# Altium PCB 采集卡.PcbDoc (part 2 of 2)
Units mil, origin at the board's own origin, x right, y up, seen from the top; angles counter-clockwise.
Board outline 5354.33 x 3248.82 mil, 2 copper layers (Top Layer, Bottom Layer); 90 components, 107 nets, 465 pads, 100 vias.
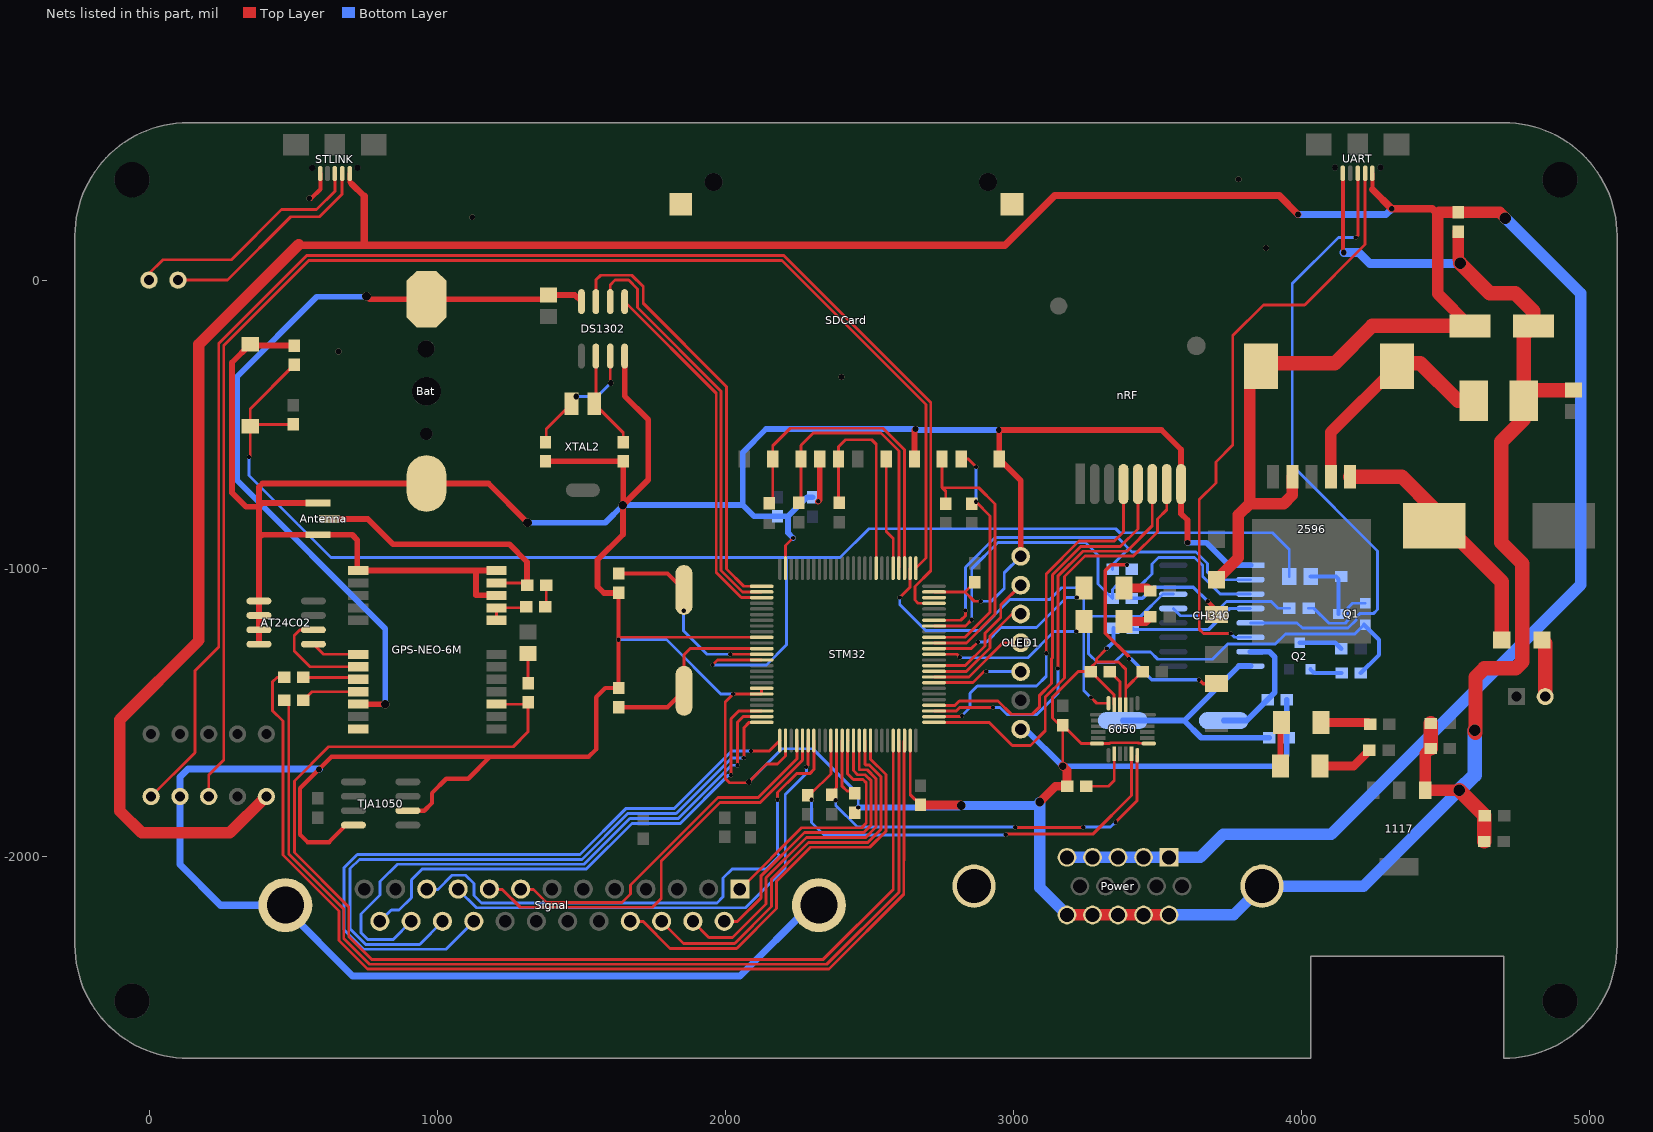
[diagram p2: the nets of this part, all layers, seen from the top]

## Via types
v1: diameter 15, hole 15, Top Layer to Bottom Layer, 60 vias
v2: diameter 20, hole 20, Top Layer to Bottom Layer, 20 vias
v3: diameter 30, hole 30, Top Layer to Bottom Layer, 9 vias
v4: diameter 40, hole 40, Top Layer to Bottom Layer, 8 vias
v5: diameter 25, hole 25, Top Layer to Bottom Layer, 2 vias
v6: diameter 35, hole 35, Top Layer to Bottom Layer, 1 vias

## Nets (pads, with @x,y where several pads share a name; then routed paths per layer and width w, separated by ;. In a path a pad name is that pad's centre, name@x,y a point inside that pad or via, vN(x,y) a via of type N, cw(c..) or ccw(c..) an arc to the next point about the centre after c; other vN are vias at no path point) (continued)
GND: 0hm.2 3V.2 5V.2 1117.1 6050.1 6050.9 6050.11 6050.18 Antenna.2 Antenna.3 AT24C02.1 AT24C02.2 AT24C02.3 AT24C02.4 Bat.2 C2.2 C3.2 C4.2 C5.1 C6.1 C7.1 C8.2 C9.1 C10.2 C11.2 C12.1 C13.2 C14.2 C15.2 C16.2 C17.1 C18.1 C19.1 C20.1 C21.2 C22.1 CH340.1 D2.1 DS1302.4 GPS-NEO-6M.10 GPS-NEO-6M.12 GPS-NEO-6M.13 GPS-NEO-6M.24 nRF.8 OLED1.1 OLED1.7 pad.4 Power.11 Power.12 Power.13 Power.14 Power.15 Power.16 Power.17 R10.1 R18.1 RST.1 SDCard.6 SDCard.10 SDCard.11 SDCard.12 SDCard.13 Signal.26 Signal.27 STLINK.5 STM32.10 STM32.19 STM32.20 STM32.27 STM32.49 STM32.74 STM32.99 TJA1050.2 TJA1050.8 UART.5 | length 27662.9
  Top Layer w10: 1630,-1239.94 STM32.10@2126.79,-1239.94 ; STM32.19@2126.79,-1417.11 STM32.20@2126.79,-1436.8 v1(2028.2,-1436.8) 2000.5,-1464.5 2000.5,-1730.5 2015,-1745 2079,-1745 v2(2082,-1742) 2144,-1680 2182,-1680 2209.46,-1652.54 STM32.27@2209.46,-1598.21 ; STM32.99@2209.46,-999.79 2209.46,-921.54 v1(2236,-895) ; STM32.49@2642.54,-1598.21 2642.54,-1786.54 C17.1@2678,-1822 ; STM32.74@2725.21,-1082.46 2832.54,-1082.46 ; C18.1@2866,-1049 2832.54,-1082.46 ; v1(2887,-1115) 2865.07,-1115 2832.54,-1082.46 ; v5@3172,-1686 C14.2@3172,-1544.93 ; v1(3325,-1279) 3289,-1315 3289,-1326 ; 6050.11@3351,-1474 3349.69,-1472.69 3349.69,-1439.62 C15.2@3269.07,-1359 ; 6050.9@3391,-1474 3391,-1417.07 ; C11.2@3449.07,-1359 3391,-1417.07 ; 6050.1@3471,-1609 3469.69,-1607.69 3436.03,-1607.69 3434.34,-1606 3338,-1606 3335,-1609 6050.18@3291,-1609 3236.07,-1609 C14.2@3172,-1544.93 ; C14.2@3172,-1544.93 3161.93,-1544.93 3137.02,-1520.02 3137.02,-1447.98 3226,-1359 C15.2@3269.07,-1359 ; C15.2@3269.07,-1359 3269.07,-1345.93 3289,-1326 ; 3289,-1326 3366,-1326 3391,-1351 3391,-1417.07
  Top Layer w15: AT24C02.3@376.51,-1209 AT24C02.3@381.51,-1214 ; v2(556,284) 561,284 562,283 594.82,315.82 STLINK.5@594.82,371 ; TJA1050.8@709.51,-1892 684,-1892 625,-1951 550,-1951 524,-1925 524,-1764 633,-1655 1184,-1655 ; TJA1050.2@898.49,-1842 955,-1842 982,-1815 982,-1781 1032,-1731 1108,-1731 1184,-1655 ; C12.1@1631,-1085.38 1630,-1086.38 C9.1@1630,-1416 1584,-1416 1552,-1448 1552,-1629 1526,-1655 1184,-1655 ; v2@4144.82,96 UART.5@4144.82,371
  Top Layer w20: RST.1@351,-222.5 288,-285.5 288,-738 336.49,-786.49 381.51,-786.49 ; RST.1@355.57,-227.07 C21.2@504,-227.07 ; AT24C02.4@381.51,-1264 AT24C02.3@381.51,-1214 AT24C02.2@381.51,-1164 AT24C02.1@381.51,-1114 381.51,-895.49 ; Antenna.2@586,-774 394,-774 381.51,-786.49 ; GPS-NEO-6M.10@1206,-1094.28 1135.28,-1094.28 1135,-1094 1135,-1007.66 ; GPS-NEO-6M.12@1206,-1007.66 1135,-1007.66 ; v3(1314,-842) 1178,-706 Bat.2@963,-706 394,-706 381.51,-718.49 381.51,-786.49 ; C22.1@1376,-629 C20.1@1646,-629 v3@1646,-780 ; C12.1@1630,-1086.38 1579.38,-1086.38 1557,-1064 1557,-971 1645,-883 v3(1645,-781) v3@1646,-780 ; DS1302.4@1651,-263.49 1651,-402 1733,-484 1733,-693 v3@1646,-780 ; v1@2322,-769 v1(2323,-768) 2328.52,-762.48 SDCard.10@2328.52,-621 ; SDCard.6@2657.65,-621 2657.65,-520.35 v2(2661,-517) ; OLED1.7@3026,-959 3026,-695.25 SDCard.11@2951.75,-621 2951.75,-521.75 v2(2950,-520) 3515,-520 3583,-588 3583,-811 3605,-833 v2(3605,-912) ; 5V.2@3928.2,-1687 3928.2,-1539 3V.2@3931.2,-1536 ; 381.51,-895.49 393,-884 Antenna.3@586,-884 705,-884 723,-902 723,-1004.66 GPS-NEO-6M.13@726,-1007.66 1135,-1007.66 ; 381.51,-895.49 381.51,-786.49
  Top Layer w30: C17.1@2678,-1822 2818,-1822 v3(2820,-1824) ; v3(3092,-1812) 3147,-1757 C4.2@3187.07,-1757 3187.07,-1701.07 v5@3172,-1686
  Top Layer w40: Power.15@3187.84,-2204 Power.11@3542.16,-2204 ; C7.1@4449.07,-1625.93 C7.1@4449,-1626 4430.55,-1644.45 1117.1@4430.55,-1771.13 v4(4549.13,-1771.13) ; v4@4545,73.14 C3.2@4545,168.07
  Top Layer w50: C7.1@4449.07,-1625.93 C8.2@4449.07,-1539 ; v4(4549.13,-1771.13) 4636,-1858 C6.1@4636,-1949 ; v4(4552,58) 4655,-45 4743,-45 4806,-108 C2.2@4806,-159 4772.61,-192.39 D2.1@4772.61,-419 ; v4(4602,-1563) 4602,-1568 4605,-1571 4605,-1379 4636,-1348 4745,-1348 4768,-1325 4768,-985 4694,-911 4694,-561 4772.61,-482.39 D2.1@4772.61,-419 ; 0hm.2@4946,-381.6 4810.02,-381.6 D2.1@4772.61,-419
  Bottom Layer w10: v1(1630,-1248) 1796,-1248 1984.8,-1436.8 v1(2028.2,-1436.8) ; v2(2082,-1742) 2197,-1627 2304,-1627 2462,-1785 v1(2462,-1831) ; v1(2887,-1115) 2924,-1115 2969,-1070 2969,-1016 OLED1.7@3026,-959
  Bottom Layer w15: v1(3325,-1279) 3348.07,-1255.93 C10.2@3348.07,-1208
  Bottom Layer w20: v3(1314,-842) 1584,-842 v3(1645,-781) 2061,-781 ; v1(2236,-895) 2218,-877 2218,-820 ; R18.1@2303,-754 2284,-754 2218,-820 ; v1(2462,-1831) 2813,-1831 v3(2820,-1824) ; v2(2950,-520) 2664,-520 v2(2661,-517) 2142,-517 2061,-598 2061,-781 ; OLED1.1@3026,-1559 3043,-1559 v5(3172,-1688) 3911.93,-1688 3949.93,-1650 C13.2@3949.93,-1457 ; v2(3605,-912) 3671,-912 3749,-990 CH340.1@3823.72,-990 ; 2061,-781 2100,-820 C19.1@2182,-820 2218,-820
  Bottom Layer w25: v2@591,-1697 135,-1697 107,-1725 pad.4@107,-1792.54 107,-2029 247.98,-2169.98 Signal.27@472.78,-2169.98 472.78,-2181.68 706.6,-2415.5 2051.5,-2415.5 2297.02,-2169.98 Signal.26@2325.22,-2169.98
  Bottom Layer w30: v3(2820,-1824) 3080,-1824 v3(3092,-1812) ; v2(4148,96) 4200,96 4238,58 v4(4552,58)
  Bottom Layer w40: v3@3093,-1814 3093,-2109.16 Power.15@3187.84,-2204 ; Power.11@3542.16,-2204 3765,-2204 3865,-2104 4216.25,-2104 v4(4549.13,-1771.13)
  Bottom Layer w50: v4(4549.13,-1771.13) 4602,-1718.25 v4(4602,-1563)
  other v2: 590,-1699 2404,-336 658,-248 3878,112 1122,218 3782,350
GPS_SCL: AT24C02.6 GPS-NEO-6M.19 | length 373.3
  Top Layer w10: AT24C02.6@570.49,-1214 524,-1214 504,-1234 504,-1288 558.31,-1342.31 GPS-NEO-6M.19@726,-1342.31
GPS_SDA: AT24C02.5 GPS-NEO-6M.18 | length 170
  Top Layer w10: AT24C02.5@570.49,-1264 605.49,-1299 GPS-NEO-6M.18@726,-1299
INT: 6050.12 STM32.77 | length 1332.6
  Top Layer w10: v1(2606,-1102) 2642,-1066 2642,-1000.32 STM32.77@2642.54,-999.79 ; v1(3270,-1449) 3290,-1469 6050.12@3331,-1469
  Bottom Layer w10: v1(2606,-1102) 2606,-1126 2697,-1217 2881,-1217 2989,-1109 3127,-1109 3168,-1068 3230,-1068 3245,-1083 3245,-1425 v1@3270,-1450
IO0: Signal.17 STM32.42 | length 1486.9
  Top Layer w10: Signal.17@1670.75,-2226.89 1715.43,-2226.89 1808.54,-2320 2040.04,-2320 2178.04,-2182 2178.04,-2087.08 2296.12,-1969 2502.17,-1969 2558,-1913.17 2558,-1716.83 2504.74,-1663.57 STM32.42@2504.74,-1598.21
IO1: Signal.16 STM32.41 | length 1351.8
  Top Layer w10: Signal.16@1779.45,-2226.89 1855.56,-2303 2033,-2303 2161.04,-2174.96 2161.04,-2080.04 2289.08,-1952 2495.12,-1952 2541,-1906.12 2541,-1723.88 2500.12,-1683 2487,-1683 2485.06,-1681.06 STM32.41@2485.06,-1598.21
IO2: Signal.15 STM32.40 | length 1211
  Top Layer w10: Signal.15@1888.15,-2226.89 1943.26,-2282 2026,-2282 2142,-2166 2142,-2075.04 2282.04,-1935 2488.08,-1935 2524,-1899.08 2524,-1730.92 2493.08,-1700 2467.04,-1700 2465.37,-1698.33 STM32.40@2465.37,-1598.21
IO3: Signal.14 STM32.39 | length 1027.8
  Top Layer w10: Signal.14@1996.85,-2226.89 2042.11,-2226.89 2125,-2144 2125,-2068 2275,-1918 2481.04,-1918 2507,-1892.04 2507,-1737.96 2486.04,-1717 2460,-1717 2445.69,-1702.68 STM32.39@2445.69,-1598.21
IO4: Signal.1 STM32.38 | length 868.1
  Top Layer w10: Signal.1@2051.2,-2115.08 2265.28,-1901 2474,-1901 2490,-1885 2490,-1745 2479,-1734 2445,-1734 2425,-1714 2425,-1599.21 STM32.38@2426,-1598.21
IRQ: nRF.7 STM32.51 | length 1606.5
  Top Layer w10: STM32.51@2725.21,-1535.22 2916.22,-1535.22 2997,-1616 3060,-1616 3111.5,-1564.5 3111.5,-1447.5 3178,-1381 3178,-1029.17 3249.08,-958.08 3416.92,-958.08 3501,-874 3501,-829 3533,-797 nRF.7@3533,-708 nRF.7@3533,-672
LED1: LED1.2 STM32.64 | length 569.2
  Top Layer w10: STM32.64@2725.21,-1279.32 2854.69,-1279.32 v1(2878,-1256)
  Bottom Layer w10: v1(2878,-1256) 2908,-1256 2958,-1206 3081,-1206 3185,-1102 v1(3221,-1102)
LED2: LED2.2 STM32.63 | length 536.5
  Top Layer w10: STM32.63@2725.21,-1299 2805,-1299 v1(2815,-1309)
  Bottom Layer w10: v1(2815,-1309) 2817,-1311 3051,-1311 3142,-1220 v1(3219,-1220)
MISO: nRF.6 STM32.53 | length 1443.1
  Top Layer w10: STM32.53@2725.21,-1495.85 2802.19,-1495.85 2815.04,-1483 2816.04,-1484 v1(2930,-1484) ; v1(3155,-1348) 3155,-1028.12 3242.04,-941.08 3394.92,-941.08 3483,-853 nRF.6@3483,-708 nRF.6@3483,-693
  Bottom Layer w10: v1(2930,-1484) 2954,-1484 2978,-1508 3082,-1508 3155,-1435 v1(3155,-1348)
MOSI: nRF.5 STM32.54 | length 1433.9
  Top Layer w10: STM32.54@2725.21,-1476.17 2797.83,-1476.17 2813,-1461 2947,-1461 2993,-1507 3066,-1507 3092,-1481 3092,-1441 3133,-1400 3133,-1314.42 3136,-1311.42 3136,-1023.08 3235,-924.08 3372.92,-924.08 3433,-864 nRF.5@3433,-708 nRF.5@3433,-672
NC: STM32.73
Net3V_1: 3V.1 R15.1 | length 172.5
  Top Layer w30: 3V.1@4069,-1536 4233,-1536 R15.1@4239,-1542
Net5V_1: 5V.1 R12.1 | length 193.8
  Top Layer w30: 5V.1@4066,-1687 4182,-1687 R12.1@4237,-1632
Net8M_1: 8M.1 C12.2 STM32.13 | length 623.8
  Top Layer w10: v1(2018,-1299) STM32.13@2126.79,-1299
  Top Layer w15: C12.2@1631,-1018.45 1799.79,-1018.45 8M.1@1856.83,-1075.49
  Bottom Layer w10: v1(1856,-1148) 1856,-1218 1937,-1299 v1(2018,-1299)
Net8M_2: 8M.2 C9.2 STM32.12 | length 654.4
  Top Layer w10: 8M.2@1857.17,-1425.89 1857.17,-1300.83 1878.69,-1279.32 STM32.12@2126.79,-1279.32
  Top Layer w15: C9.2@1630,-1482.93 1800.13,-1482.93 8M.2@1857.17,-1425.89
Net12M_1: 12M.1 C16.1 CH340.8 | length 842.2
  Bottom Layer w20: 12M.1@3380.8,-1528.83 3595.17,-1528.83 3784,-1340 CH340.8@3823.72,-1340 ; 3592.83,-1528.83 3653,-1589 C16.1@3889,-1589
Net12M_2: 12M.2 C13.1 CH340.7 | length 432.8
  Bottom Layer w20: 12M.2@3731.2,-1529.17 3810.83,-1529.17 C13.1@3883,-1457 3908,-1432 3908,-1308 3890,-1290 CH340.7@3823.72,-1290
Net2596_1: 2596.1 C1.1 D1.2 | length 913
  Top Layer w50: 2596.1@4169.86,-682.66 4349.66,-682.66 4462,-795 C1.1@4462,-853 4502,-853 4696,-1047 D1.2@4696,-1249
Net2596_2: 2596.2 D2.2 L1.1 | length 804.6
  Top Layer w40: 2596.2@4102.93,-682.66 4102.93,-528.29 L1.1@4332.22,-299 L1.1@4343.22,-288
  Top Layer w50: L1.1@4343.22,-288 4413.22,-288 4544.22,-419 D2.2@4599.39,-419
Net6050_10: 6050.10 C15.1 | length 129.5
  Top Layer w10: C15.1@3336,-1359 3371,-1394 6050.10@3371,-1474
Net6050_20: 6050.20 C4.1 | length 198.3
  Top Layer w10: C4.1@3254,-1757 3331,-1757 3351,-1737 6050.20@3351,-1644
NetAntenna_1: Antenna.1 GPS-NEO-6M.11 L2.2 | length 938.2
  Top Layer w10: GPS-NEO-6M.11@1206,-1050.97 1304.08,-1050.97 L2.2@1312.11,-1059
  Top Layer w20: Antenna.1@626,-829 759,-829 847,-917 1251,-917 1312.11,-978.11 L2.2@1312.11,-1059
NetC10_1: C10.1 CH340.4 | length 443.7
  Bottom Layer w12: C10.1@3415,-1208 3415,-1212.84 3679.16,-1212.84 3752,-1140 CH340.4@3823.72,-1140
NetC20_2: C20.2 DS1302.2 XTAL2.2 | length 342.6
  Top Layer w10: DS1302.2@1551,-263.49 1551,-423.37 XTAL2.2@1545.37,-429 1646,-529.63 C20.2@1646,-562.07
NetC22_2: C22.2 DS1302.3 XTAL2.1 | length 404.4
  Top Layer w10: C22.2@1376,-562.07 1379,-559.07 1379,-516.63 XTAL2.1@1466.63,-429 ; DS1302.3@1601,-263.49 1601,-355 v2(1603,-357)
  Bottom Layer w10: v2(1483,-404) 1556,-404 v2(1603,-357)
NetCH340_13: CH340.13 R16.2 | length 443.1
  Bottom Layer w10: CH340.13@3556,-1140 3581,-1165 3692,-1165 3741,-1116 3896,-1116 3919,-1139 R16.2@3958.9,-1139
NetCH340_14: CH340.14 Q1.2 R17.2 | length 1708.1
  Bottom Layer w10: CH340.14@3556,-1090 3520,-1090 3443,-1167 3274,-1167 3262,-1179 3262,-1297 3293,-1328 3351,-1328 3388,-1291 3477,-1291 3502,-1316 3692,-1316 3745,-1263 3910,-1263 3944.96,-1228.04 4186.14,-1228.04 Q1.2@4217.77,-1196.4
  Bottom Layer w15: R17.2@4206.93,-1364 4270,-1300.93 4270,-1248.63 Q1.2@4217.77,-1196.4
NetD1_1: D1.1 P1.2 | length 187
  Top Layer w50: P1.2@4847,-1447 D1.1@4847,-1260
NetD5_2: D5.2 Q1.3 R13.2 | length 221
  Bottom Layer w15: D5.2@4033.4,-1029 4120.58,-1029 4129.74,-1038.16 Q1.3@4129.74,-1159
NetGPS-NEO-6M_8: GPS-NEO-6M.8 GPS-NEO-6M.9 R26.2 | length 148.1
  Top Layer w10: GPS-NEO-6M.8@1206,-1180.89 GPS-NEO-6M.9@1206,-1137.58 1304.99,-1137.58 R26.2@1309.07,-1133.5
NetGPS-NEO-6M_20: GPS-NEO-6M.20 R27.1 | length 192.7
  Top Layer w10: R27.1@536,-1379 719.39,-1379 GPS-NEO-6M.20@726,-1385.61
NetGPS-NEO-6M_21: GPS-NEO-6M.21 R28.1 | length 202.5
  Top Layer w10: R28.1@536,-1459 566.08,-1428.92 GPS-NEO-6M.21@726,-1428.92
NetL2_1: L2.1 R26.1 | length 71.5
  Top Layer w10: R26.1@1379.04,-1130.46 L2.1@1379.04,-1059
NetLED1_1: LED1.1 R20.1 | length 96.1
  Top Layer w30: LED1.1@3384,-1069 3466,-1069 R20.1@3476,-1079
NetLED2_1: LED2.1 R21.1 | length 98.6
  Top Layer w30: LED2.1@3384,-1185 3460,-1185 R21.1@3476,-1169
NetPCC_2: PCC.2 R29.1 | length 102.6
  Top Layer w10: R29.1@1316,-1399 PCC.2@1316,-1296.4
NetQ1_1: Q1.1 R16.1 | length 272.6
  Bottom Layer w10: R16.1@4025.82,-1139 4043.78,-1139 4096,-1191.22 4152.64,-1191.22 4161.86,-1182 4161.86,-1138.14 4178.4,-1121.6 Q1.1@4222.26,-1121.6
NetQ2_1: Q2.1 R17.1 | length 112.9
  Bottom Layer w15: Q2.1@4032.4,-1351.26 4045.14,-1364 R17.1@4140,-1364
NetQ2_3: Q2.3 R19.2 | length 152.9
  Bottom Layer w15: Q2.3@3995,-1258.74 4117.81,-1258.74 R19.2@4139.07,-1280
NetR10_2: R10.2 STM32.37 | length 209.7
  Top Layer w10: STM32.37@2406.31,-1598.21 2406.31,-1757.32 2423.07,-1774.07 R10.2@2450,-1774.07
NetR11_2: R11.2 RX.2 | length 764
  Top Layer w12: v1(3395,-988) 3340,-988 3320,-1008 3320,-1226 3402,-1308 v1(3402,-1315) ; v1(3645,-1387) 3659.2,-1401.2 RX.2@3706,-1401.2
  Bottom Layer w12: v1(3402,-1315) 3409,-1315 3481,-1387 v1(3645,-1387)
NetR14_2: R14.2 TX.2 | length 359
  Top Layer w15: v1(3675,-1115) 3706,-1146 TX.2@3706,-1161.2
  Bottom Layer w12: R14.2@3411.82,-1105 3449,-1105 3488.34,-1065.66 3625.66,-1065.66 v1(3675,-1115)
OLED_D0: OLED1.3 STM32.58 | length 316.7
  Top Layer w10: STM32.58@2725.21,-1397.43 2860.57,-1397.43 2899,-1359 v1(2907,-1359)
  Bottom Layer w10: v1(2907,-1359) OLED1.3@3026,-1359
OLED_D1: OLED1.4 STM32.59 | length 350
  Top Layer w10: STM32.59@2725.21,-1377.74 2846.26,-1377.74 2965,-1259 OLED1.4@3026,-1259
OLED_DS: OLED1.6 STM32.61 | length 467.4
  Top Layer w10: STM32.61@2725.21,-1338.37 2833.59,-1338.37 2902,-1269.96 2902,-1226 2957,-1171 2957,-1128 OLED1.6@3026,-1059
OLED_RST: OLED1.5 STM32.60 | length 407.3
  Top Layer w10: STM32.60@2725.21,-1358.06 2837.94,-1358.06 2919,-1277 2919,-1236 2996,-1159 OLED1.5@3026,-1159
P_OUT: 2596.4 C2.1 C3.1 Fuse.1 L1.2 pad.1 Power.1 Power.2 Power.3 Power.4 Power.5 STLINK.1 UART.1 | length 13356.8
  Top Layer w15: 697.18,340.82 STLINK.1@697.18,371 ; 4247.18,314.82 UART.1@4247.18,371
  Top Layer w18: 697.18,340.82 704,334
  Top Layer w22: 704,334 747,291
  Top Layer w25: 519.5,123.5 522,121 746,121 ; 747,291 747,122 746,121 ; v2(3989,228) 3923.5,293.5 3144.19,293.5 2971.69,121 746,121 ; 4247.18,314.82 v2(4314,248) 4455,248 4474,229
  Top Layer w40: pad.1@407,-1792.54 280.54,-1919 -26,-1919 -102,-1843 -102,-1526 173,-1251 173,-223 519.5,123.5 ; Fuse.1@3706,-1040 3782,-964 3782,-815 3821,-776 ; L1.2@3870.78,-288 L1.2@3859.78,-299 3821,-337.78 3821,-776 ; 2596.4@3969.07,-682.66 3969.07,-745.93 3939,-776 3821,-776 ; C2.1@4586,-159 4474,-47 4474,229 4480,235 C3.1@4545,235 4689,235 v4(4709,215)
  Top Layer w50: L1.2@3870.78,-288 4117,-288 4246,-159 C2.1@4586,-159
  Bottom Layer w25: v2(3989,228) 4294,228 v2(4314,248)
  Bottom Layer w40: Power.5@3187.84,-2004 3649,-2004 3729,-1924 4104,-1924 4970,-1058 4970,-46 v4(4709,215)
PCCGPS: GPS-NEO-6M.3 R29.2 STM32.46 | length 4256.1
  Top Layer w10: GPS-NEO-6M.3@1206,-1472.23 1309.7,-1472.23 R29.2@1316,-1465.93 1316,-1568 1264,-1620 623,-1620 504.5,-1738.5 504.5,-1987.5 693,-2176 693,-2279 772,-2358 2340.59,-2358 2583.48,-2115.11 STM32.46@2583.48,-1598.21
PWM0: Signal.25 STM32.23 | length 1780.3
  Top Layer w10: v1(2020,-1719) 2020,-1523 2046,-1497 2046,-1495.85 STM32.23@2126.79,-1495.85
  Bottom Layer w10: Signal.25@801.15,-2226.89 841.04,-2187 868,-2187 911,-2144 911,-2082 948,-2045 1517.04,-2045 1676.04,-1886 1844,-1886 2011,-1719 v1(2020,-1719)
PWM1: Signal.24 STM32.24 | length 2063.6
  Top Layer w10: v1(2043,-1684) 2043,-1535 2062.46,-1515.54 STM32.24@2126.79,-1515.54
  Bottom Layer w10: Signal.24@909.85,-2226.89 847.74,-2289 759,-2289 736,-2266 736,-2201 802,-2135 802,-2088 862,-2028 1510,-2028 1669,-1869 1836.96,-1869 2021.96,-1684 v1(2043,-1684)
PWM2: Signal.23 STM32.25 | length 2285.4
  Top Layer w10: v1(2065,-1659) 2065,-1554 2083.78,-1535.22 STM32.25@2126.79,-1535.22
  Bottom Layer w10: Signal.23@1018.55,-2226.89 939.44,-2306 751.96,-2306 697.96,-2252 697.96,-2043 729.96,-2011 1502.96,-2011 1661.96,-1852 1829.92,-1852 2022.92,-1659 v1(2065,-1659)
PWM3: Signal.22 STM32.26 | length 2429.1
  Top Layer w10: v1(2090,-1635) 2152.99,-1635 STM32.26@2189.78,-1598.21
  Bottom Layer w10: Signal.22@1127.25,-2226.89 1031.14,-2323 744.92,-2323 676.96,-2255.04 676.96,-2039.96 722.92,-1994 1495.92,-1994 1654.92,-1835 1822.88,-1835 2022.88,-1635 v1(2090,-1635)
RST: C21.1 D5.1 R22.2 RST.2 STM32.14 | length 5262.4
  Top Layer w10: v1(347,-614) 351,-610 RST.2@351,-507.5 ; R22.2@500,-500.61 357.89,-500.61 RST.2@351,-507.5 ; C21.1@504,-294 351,-447 RST.2@351,-507.5 ; v1(1956,-1336) 1973.31,-1318.68 STM32.14@2126.79,-1318.68
  Bottom Layer w10: v1(347,-614) 347,-678 632,-963 2399,-963 2499,-863 3356.04,-863 3370.04,-877 3900,-877 3958.6,-935.6 D5.1@3958.6,-1029 ; v1(1956,-1336) 2143,-1336 2213,-1266 2213,-963
RTC_CLK: DS1302.7 STM32.1 | length 1509.3
  Top Layer w10: DS1302.7@1551,-74.51 1551,0 1568,17 1676,17 1715.5,-22.5 1715.5,-80.5 2005,-370 2005,-1002.92 2064.86,-1062.78 STM32.1@2126.79,-1062.78
RTC_IO: DS1302.6 STM32.2 | length 1441.1
  Top Layer w10: DS1302.6@1601,-74.51 1601,-17 1618,0 1665,0 1695.5,-30.5 1695.5,-94.97 1986,-385.47 1986,-1007.96 2060.51,-1082.46 STM32.2@2126.79,-1082.46
RTC_RST: DS1302.5 STM32.3 | length 1266.1
  Top Layer w10: DS1302.5@1651,-74.51 1969,-392.51 1969,-1015 2056.15,-1102.15 STM32.3@2126.79,-1102.15
RX1: CH340.2 R11.1 STM32.69 | length 1489.1
  Top Layer w10: STM32.69@2725.21,-1180.89 2818.11,-1180.89 2834,-1165 v1(2834,-1147)
  Bottom Layer w10: v1(2834,-1147) 2834,-997 2937,-894 3363,-894 3413,-944 3635.04,-944 3675,-983.96 3675,-1014 3701,-1040 CH340.2@3823.72,-1040 ; R11.1@3344.9,-1004 3344.9,-988.1 3401,-932
RX3GPS: R27.2 STM32.48 | length 3685.3
  Top Layer w10: R27.2@469.07,-1379 444,-1379 428.96,-1394.04 428.96,-1495 465,-1531.04 465,-1996.08 659,-2190.08 659,-2293.08 757.92,-2392 2360.04,-2392 2620.17,-2131.88 2620.17,-2014.88 2621.07,-2013.97 2621.07,-1599.99 STM32.48@2622.85,-1598.21
SCK: nRF.4 STM32.52 | length 1366.4
  Top Layer w10: STM32.52@2725.21,-1515.54 2818.46,-1515.54 v1(2822,-1512) ; v1(3115,-1295) 3115,-1020.04 3229,-906.04 3350.96,-906.04 3383,-874 nRF.4@3383,-708 nRF.4@3383,-672
  Bottom Layer w10: v1@2819,-1515 v1(2822,-1512) 2850.5,-1483.5 2850.5,-1434.5 2875.5,-1409.5 3080.5,-1409.5 3115,-1375 v1(3115,-1295)
SCL: 6050.23 R7.2 STM32.35 | length 1634.2
  Top Layer w10: R7.2@2285.93,-1781.07 2287,-1781.07 2299.97,-1781.07 2366.94,-1714.1 STM32.35@2366.94,-1598.21 ; v1(2974,-1926) 2976.5,-1923.5 3276.5,-1923.5 3411,-1789 6050.23@3411,-1644
  Bottom Layer w10: v1(2300,-1804) 2300,-1883 2343,-1926 v1(2974,-1926)
SD_CLK: SDCard.5 STM32.80 | length 388.8
  Top Layer w10: SDCard.5@2559.23,-621 2559.23,-872.27 2583.48,-896.52 STM32.80@2583.48,-999.79
SD_CMD: R4.2 SDCard.3 STM32.83 | length 754.8
  Top Layer w10: R4.2@2396,-754.39 2393.48,-751.87 SDCard.3@2393.48,-621 2393.48,-578.52 2418,-554 2509,-554 2524.43,-569.43 STM32.83@2524.43,-999.79
SD_D0: R5.2 SDCard.7 STM32.65 | length 1003.4
  Top Layer w10: STM32.65@2725.21,-1259.63 2837.37,-1259.63 2937,-1160 2937,-777.09 2880.66,-720.74 2753.67,-720.74 ; SDCard.7@2752.93,-621 2752.93,-720 2753.67,-720.74 ; R5.2@2766,-776.39 2766,-733.07 2753.67,-720.74
SD_D1: R6.2 SDCard.8 STM32.66 | length 817.8
  Top Layer w10: STM32.66@2725.21,-1239.94 2833.01,-1239.94 2920,-1152.96 2920,-818.39 v1(2871,-769.39) ; SDCard.8@2819.86,-621 2844,-621 v1(2872,-649)
  Bottom Layer w10: v1(2871,-769.39) v1@2871,-650
SD_D2: R2.2 SDCard.1 STM32.78 | length 1106.1
  Top Layer w10: R2.2@2165.13,-756.07 SDCard.1@2165.13,-621 2165.13,-574.87 2225.83,-514.17 2548.37,-514.17 2622.85,-588.64 STM32.78@2622.85,-999.79
SD_D3: R3.2 SDCard.2 STM32.79 | length 989.5
  Top Layer w10: R3.2@2263.56,-773.39 SDCard.2@2263.56,-621 2263.56,-573.44 2305.83,-531.17 2541.33,-531.17 2603.17,-593 STM32.79@2603.17,-999.79
SDA: 6050.24 R9.2 STM32.36 | length 1482.1
  Top Layer w10: R9.2@2370,-1778.07 2387,-1761.07 2387,-1598.58 STM32.36@2386.63,-1598.21 ; v1(3007,-1900) 3242,-1900 v1(3243,-1899) ; v1(3355,-1882) 3429.69,-1807.31 3429.69,-1650.31 6050.24@3431,-1649
  Bottom Layer w10: v1(2384,-1806) 2384,-1824 2459,-1899 v1@3010,-1899 ; v1(3243,-1899) 3338,-1899 v1(3355,-1882)
SWCLK: pad.3 STM32.76 | length 4955
  Top Layer w10: pad.3@207,-1811 pad.3@207,-1792.54 207,-1718 259,-1666 259,-227 554,68 2197,68 2697,-432 2697,-965.01 STM32.76@2662.22,-999.79
SWDIO: pad.5 STM32.72 | length 5259
  Top Layer w10: pad.5@7,-1792.54 159,-1640.54 159,-1356.25 242,-1273.25 242,-219.96 546.96,85 2204.04,85 2714,-424.96 2714,-1008.76 2659,-1063.76 2659,-1111 2669.83,-1121.83 STM32.72@2725.21,-1121.83
TX1: CH340.3 R14.1 STM32.68 | length 1632.8
  Top Layer w10: STM32.68@2725.21,-1200.57 2834.43,-1200.57 v1(2856,-1179)
  Bottom Layer w10: v1(2856,-1179) 2856,-1002 2947,-911 3251,-911 3295,-955 3295,-1055.1 R14.1@3344.9,-1105 3344.9,-1074.1 3358,-1061 3441,-1061 3482,-1020 3482,-986 3505,-963 3630,-963 3658,-991 3658,-1029 3719,-1090 CH340.3@3823.72,-1090
TX3GPS: R28.2 STM32.47 | length 3507
  Top Layer w10: R28.2@469.07,-1459 485,-1474.93 485,-1992.04 676,-2183.04 676,-2286.04 764.96,-2375 2353,-2375 2603.17,-2124.83 STM32.47@2603.17,-1598.21
U+: pad.U+ STLINK.3 | length 848.9
  Top Layer w10: pad.U+@0,0 0,23 48,71 286,71 460,245 581,245 646,310 STLINK.3@646,371
U-: pad.U- STLINK.2 | length 767.1
  Top Layer w10: pad.U-@100,0 272,0 492,220 592,220 670.18,298.18 670.18,369.59 STLINK.2@671.59,371
UD+: CH340.5 UART.3 | length 2248.3
  Top Layer w10: v1(4189,148) 4197,156 4197,370 UART.3@4196,371
  Bottom Layer w10: CH340.5@3823.72,-1190 3985.85,-1190 4004.07,-1208.22 4162.78,-1208.22 4191,-1180 4191,-1170 4203,-1158 4250,-1158 4265,-1143 4265,-940 3969,-644 3969,-12 4129,148 v1(4189,148)
UD-: CH340.6 UART.2 | length 2094.5
  Top Layer w10: v1(3755,-1227) 3661,-1227 3646,-1212 3646,-762 3704,-704 3704,-631 3762.5,-572.5 3762.5,-192.5 3869,-86 4012,-86 4221.59,123.59 UART.2@4221.59,371
  Bottom Layer w10: v1(3755,-1227) 3768,-1240 CH340.6@3823.72,-1240
V_BAT: Bat.1 D10.2 DS1302.8 GPS-NEO-6M.22 | length 2843.5
  Top Layer w20: v3(755,-56) 765,-66 Bat.1@963,-66 1371.6,-66 D10.2@1386,-51.6 1478.09,-51.6 DS1302.8@1501,-74.51 ; 795.77,-1472.23 GPS-NEO-6M.22@726,-1472.23 726.23,-1472 v3(820,-1472)
  Bottom Layer w20: v3@754,-58 582,-58 305,-335 305,-695 820,-1210 v3(820,-1472)
悬架行程—右前: Signal.8 STM32.29 | length 1266
  Top Layer w10: Signal.8@1290.3,-2115.08 1334.98,-2115.08 1380.25,-2160.35 1642,-2160.35 1671,-2131.35 1671,-2100 1975,-1796 2115,-1796 2248.83,-1662.17 STM32.29@2248.83,-1598.21
悬架行程—右后: Signal.9 STM32.30 | length 1468.7
  Top Layer w10: Signal.9@1181.6,-2115.08 1226.28,-2115.08 1288.55,-2177.35 1747.65,-2177.35 1778,-2147 1778,-2017.04 1982.04,-1813 2122.04,-1813 2268.52,-1666.52 STM32.30@2268.52,-1598.21
悬架行程—左前: Signal.11 STM32.32 | length 1896.7
  Top Layer w10: v1(2182,-1804) 2182,-1779 2247.58,-1713.42 2293.54,-1713.42 2307.89,-1699.07 STM32.32@2307.89,-1598.21
  Bottom Layer w10: Signal.11@964.2,-2115.08 1002.92,-2115.08 1052,-2066 1099,-2066 1128,-2095 1128,-2136 1154,-2162 1972,-2162 1993,-2141 1993,-2076 2024,-2045 2142,-2045 2189,-1998 2182,-1991 v1(2182,-1804)
悬架行程—左后: Signal.10 STM32.31 | length 1695.2
  Top Layer w10: v1(2282,-1690) 2288.2,-1683.8 STM32.31@2288.2,-1598.21
  Bottom Layer w10: Signal.10@1072.9,-2115.08 1136.82,-2179 2070.79,-2179 2208.5,-2041.29 2208.5,-1785.5 2282,-1712 v1(2282,-1690)
pads on no net: 1117.4 2596.6 6050.2 6050.3 6050.4 6050.5 6050.6 6050.7 6050.14 6050.15 6050.16 6050.17 6050.19 6050.21 6050.22 AT24C02.7 Bat.0 CH340.9 CH340.10 CH340.11 CH340.12 CH340.15 GPS-NEO-6M.1 GPS-NEO-6M.2 GPS-NEO-6M.4 GPS-NEO-6M.5 GPS-NEO-6M.6 GPS-NEO-6M.14 GPS-NEO-6M.15 GPS-NEO-6M.16 GPS-NEO-6M.17 nRF.10 nRF.11 SDCard. SDCard.9 STLINK. STLINK.4 STLINK.6 STLINK.7 STLINK.8 STM32.4 STM32.5 STM32.7 STM32.8 STM32.9 STM32.43 STM32.44 STM32.45 STM32.55 STM32.62 STM32.67 STM32.81 STM32.82 STM32.84 STM32.85 STM32.86 STM32.87 STM32.88 STM32.89 STM32.90 STM32.91 STM32.97 STM32.98 TJA1050.5 UART. UART.4 UART.6 UART.7 UART.8 XTAL2.3
copper on no net: | length 485.9
  Bottom Layer w20: 3156,265 3159,262 ; 3159,-169 3161,-167 3637,-167 3635,-165

## Polygon pours and split planes (outlines as drawn)
GND on Top Layer "Top Layer-No Net" (solid, remove dead copper, pour order 2): -691.49,-2807 -559.49,-2939 4828.51,-2939 4992.51,-2939 5542.51,-2389 5448.51,-2295 5448.51,519 5216.51,519 4945.51,790 4891.51,844 -497.49,844
GND on Bottom Layer "Top Layer-No Net" (solid, remove dead copper, pour order 4): -545,-2895 5145,-2895 5324,-2716 5440,-2600 5440,-1530 5440,432 5169,703 5053,819 -405,819

## Keep-outs
Keep-Out Layer:
  lines w10: -257.61,-2307.95 ccw(c136.09,-2307.95) 136.09,-2701.65 4033.73,-2701.65 4033.73,-2347.32 4368.38,-2347.32 4703.02,-2347.32 4703.02,-2701.65 ccw(c4703.02,-2307.95) 5096.72,-2307.95 5096.72,153.47 ccw(c4703.02,153.47) 4703.02,547.17 136.09,547.17 ccw(c136.09,153.47) -257.61,153.47 -257.61,-2307.95

## Other copper
Top Layer:
  pour cut-out: 471,-733 793,-733 914,-854 1273,-854 1435,-1016 1435,-1189 471,-1189 469,-1187

## Silkscreen, mask and mechanical layers (free items; w line width, h text height)
Top Overlay:
  lines w10: -257.61,-1077.24 -123,-1077 ; 214.83,-2701.65 215,-2590 ; 519.56,-31 519.56,29.26 582,29.26 ; 1317,457 1317.19,547.17 ; 2419.56,-2701.65 2419.56,-2600 ; 3521.92,476 3521.92,547.17 ; 4265,-2183.73 4319.56,-2183.73 4319.56,-2125 ; 350.66,-2780.39 2441.21,-2780.39 2441.21,-2205.58 350.66,-2205.58 350.66,-2780.39 ; 484.52,362.13 484.52,558.98 799.48,558.98 799.48,362.13 484.52,362.13 ; 1860.5,-535.5 2978.61,-535.5 2978.61,606.23 1860.5,606.23 1860.5,-535.5 ; 2758.14,-2780.39 3970.74,-2780.39 3970.74,-2205.58 2758.14,-2205.58 2758.14,-2780.39 ; 4039.64,362.13 4354.6,362.13 4354.6,558.98 4039.64,558.98 4039.64,362.13
  text "12V" at 4831,-1536 h100 r270
  text "GND" at 3050,-1800 h80 r90
Bottom Overlay:
  lines w10: -108,-1851 -108,-338.54 530,-338.54 530,-1845.54 ; -102,-1851.54 531,-1851.54
  lines w20: 3186.84,-2204 3541.16,-2204 3639,-2204 3640,-2203 3640,-1765 3485,-1765 ; 3186.84,-2004 3546,-2004 3546,-1906 3540,-1900 3485,-1900 ; 3230,-2105 3586.17,-2104 3586.17,-1836.17 3580,-1830 3485,-1830
  text "U+" at 21,-63 h70 r90
  text "U-" at 128,-63.27 h70 r90
  text "多功能无线数据采集系统" at 4657,-1297 h140 r270
  text "Designed By YYH&CZ" at 4821,-1304 h140 r270
  text "GND" at 3431,-1778 h70
  text "3V3" at 3429,-1846 h70
  text "SWDIO" at 31,-1865.93 h70 r90
  text "GND" at 124,-1865.93 h70 r90
  text "SWCLK" at 234,-1865.93 h70 r90
  text "5V" at 433,-1866 h70 r90
  text "5V" at 3422,-1917 h70
  text "CANH" at 722,-2001 h70 r270
  text "CANL" at 829,-2001 h70 r270
  text "悬挂行程-左前" at 944,-2001 h70 r270
  text "悬挂行程-左后" at 1053,-2001 h70 r270
  text "悬挂行程-右后" at 1164,-2001 h70 r270
  text "悬挂行程-右前" at 1271,-2001 h70 r270
  text "ADC1" at 1389,-2001 h70 r270
  text "ADC2" at 1490,-2001 h70 r270
  text "ADC3" at 1610,-2001 h70 r270
  text "电流型ADC1" at 1708,-2001 h70 r270
  text "电流型ADC2" at 1819,-2001 h70 r270
  text "电流型ADC2" at 1927,-2001 h70 r270
  text "IO4" at 2035,-2001 h70 r270
  text "IO1" at 1770,-2403.28 h70 r270
  text "IO3" at 1985,-2410.59 h70 r270
  text "IO0" at 1665,-2412.23 h70 r270
  text "IO2" at 1880,-2411.75 h70 r270
  text "PWM0" at 765,-2482.71 h70 r270
  text "PWM1" at 880,-2482.71 h70 r270
  text "PWM3" at 1105,-2490.02 h70 r270
  text "PWM2" at 1000,-2491.18 h70 r270
  text "CAPTURE1" at 1325,-2586.05 h70 r270
  text "CAPTURE3" at 1545,-2593.36 h70 r270
  text "CAPTURE0" at 1220,-2595 h70 r270
  text "CAPTURE2" at 1430,-2594.52 h70 r270
Mechanical 1:
  circle w0.5: c108519.18,63201.71 r61.02
  circle w0.5: c108519.18,66052.87 r61.02
  circle w0.5: c113475.86,63201.71 r61.02
  circle w0.5: c113475.86,66052.87 r61.02
  lines w0.5: 108320.35,64627.29 113674.69,64627.29 ; 108792.79,63002.88 108792.79,63498.94 ; 109895.16,65942.12 109895.16,66251.7 ; 110997.52,63002.88 110997.52,66251.7 ; 112099.88,65942.12 112099.88,66251.7 ; 108320.35,63396.58 ccw(c108714.05,63396.58) 108714.05,63002.88 112611.69,63002.88 112611.69,63357.21 112946.34,63357.21 113280.99,63357.21 113280.99,63002.88 ccw(c113280.99,63396.58) 113674.69,63396.58 113674.69,65858 ccw(c113280.99,65858) 113280.99,66251.7 108714.05,66251.7 ccw(c108714.05,65858) 108320.35,65858 108320.35,63396.58 ; 108928.62,62924.14 108928.62,63498.94 111019.17,63498.94 111019.17,62924.14 108928.62,62924.14 ; 109062.48,66066.66 109377.44,66066.66 109377.44,66263.51 109062.48,66263.51 109062.48,66066.66 ; 109097.52,63520.79 109097.52,65733.78 112897.52,65733.78 112897.52,63520.79 109097.52,63520.79 ; 110438.46,65169.02 110438.46,66310.75 111556.57,66310.75 111556.57,65169.02 110438.46,65169.02 ; 111336.1,62924.14 111336.1,63498.94 112548.7,63498.94 112548.7,62924.14 111336.1,62924.14 ; 112617.6,66066.66 112617.6,66263.51 112932.56,66263.51 112932.56,66066.66 112617.6,66066.66
  text "洋红色为keepout层，蓝色为有机玻璃覆盖层（即这一部分封盒以后也是可以被看到的，防串口，swd和呼吸灯，黑色为对外的接插件，应严格遵守在图中的尺寸）" at 114548.3,65797.1 h50

## Text inside footprints (layer, text, board x,y; h text height)
nRF: Top Overlay "NO COPPER" at 3178,44 h50
Signal: Top Overlay "1" at 2061.05,-1974.12 h50 r180; Top Overlay "13" at 791.09,-1974.12 h50 r180; Top Overlay "14" at 2041.15,-2348.13 h50 r180; Top Overlay "25" at 850.36,-2348.13 h50 r180